# EAGLE board Lilypad_Arduino_USB_Panel-v11 (EAGLE 6.3)
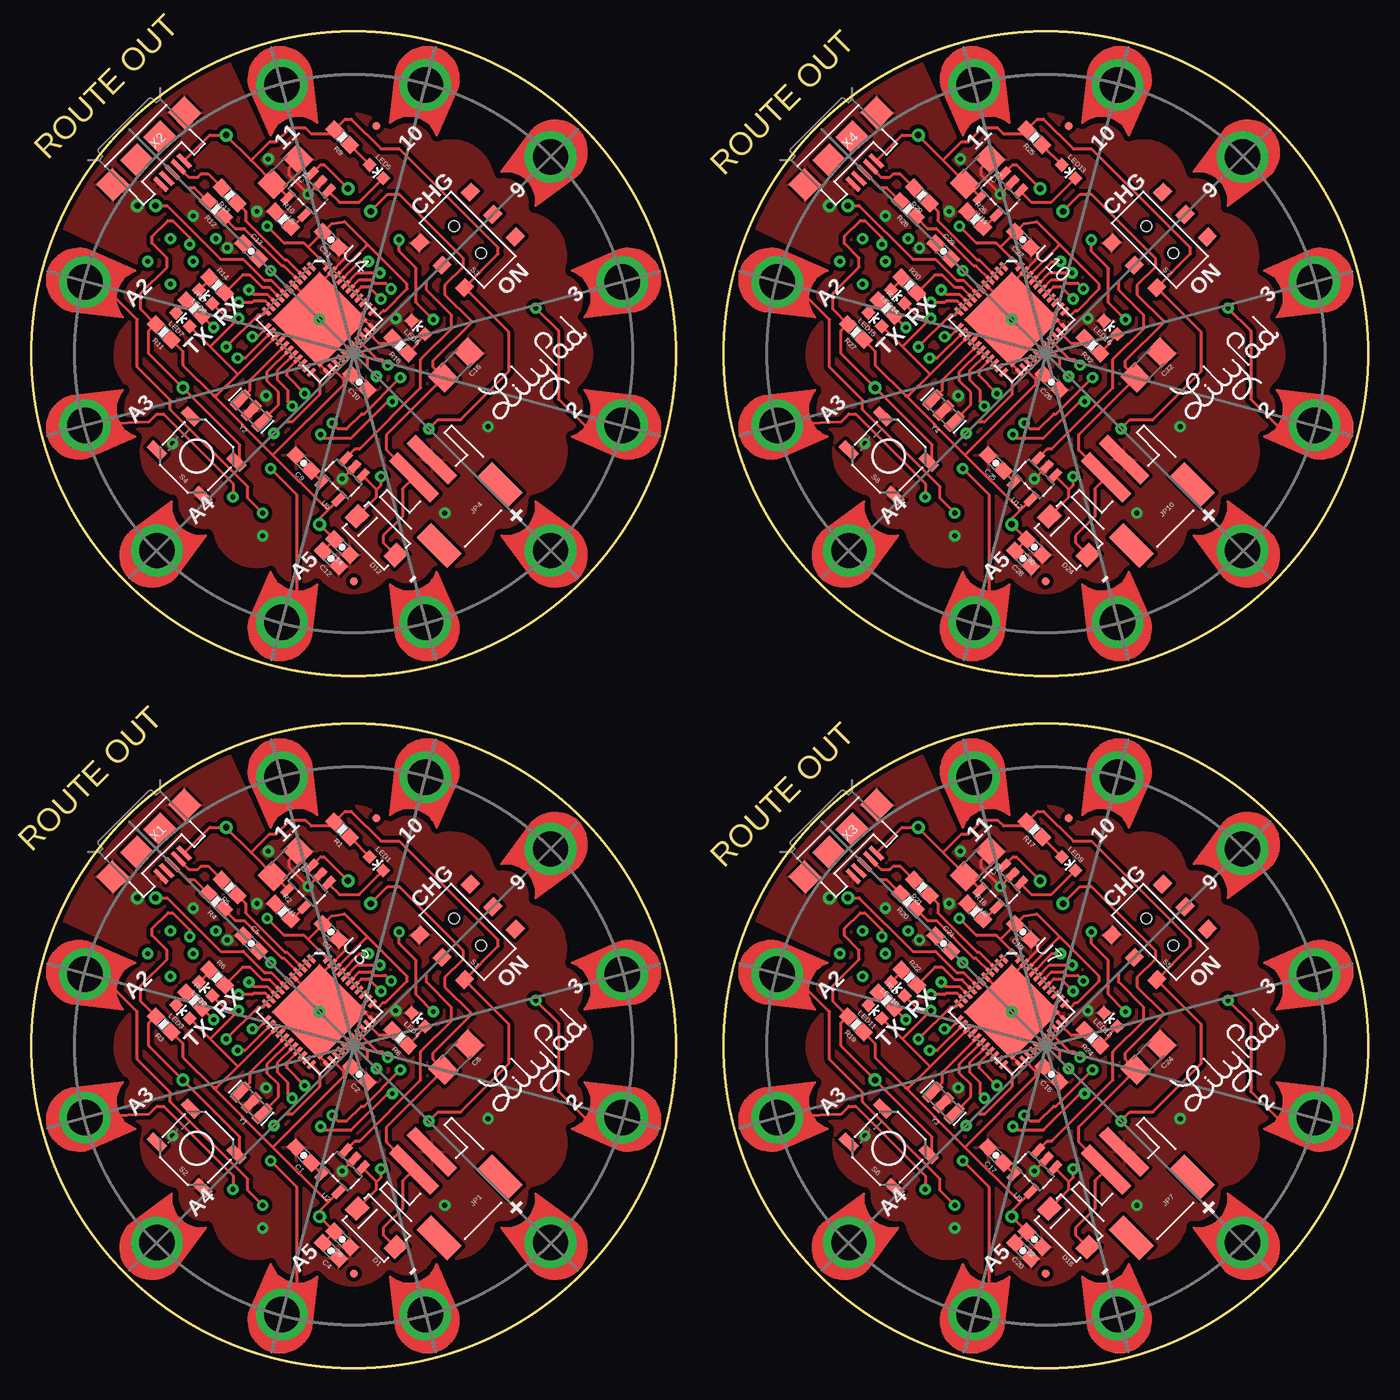
[diagram p0: board, top side]
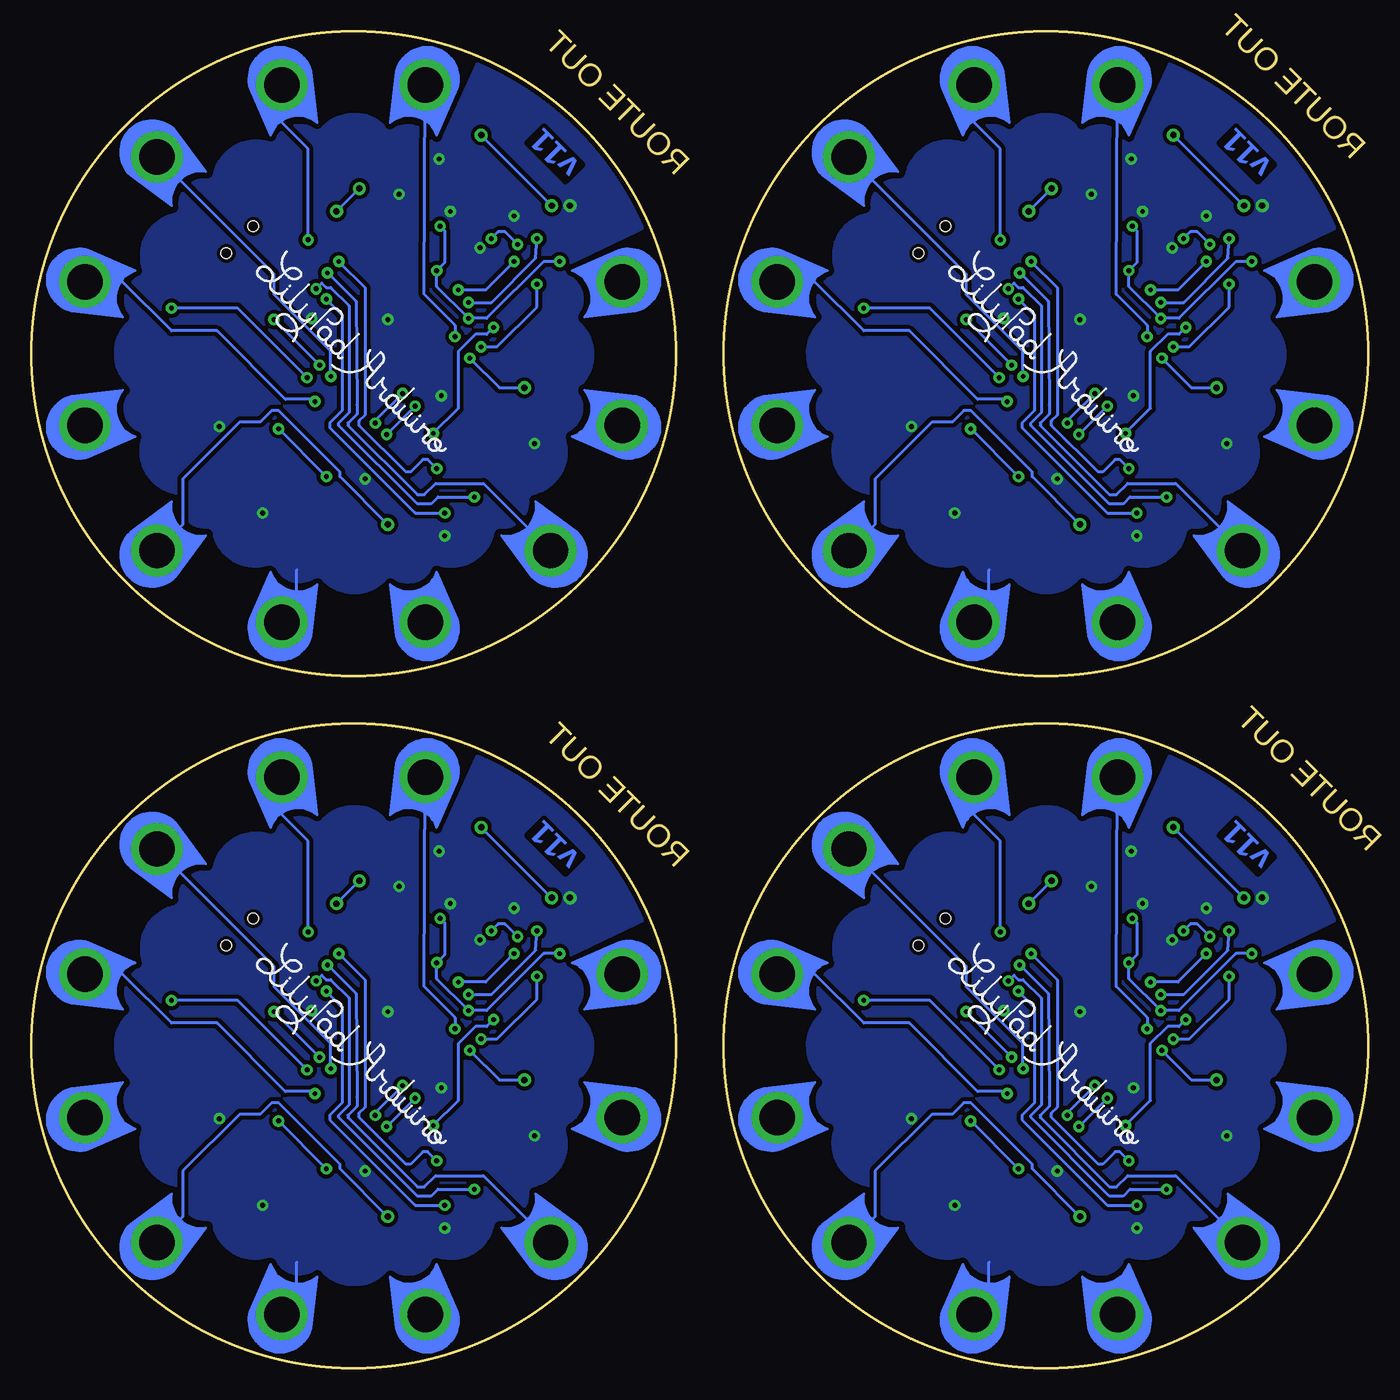
[diagram p1: board, bottom side, seen from below]

Size 105.41 x 105.41 mm. Coordinates in mm from the lower left corner, seen from the top.
Outline: circle at 25.4,25.4 radius 25.4
Outline: circle at 25.4,80.01 radius 25.4
Outline: circle at 80.01,25.4 radius 25.4
Outline: circle at 80.01,80.01 radius 25.4
Copper layers (1*16): Top 0.035mm / dielectric 1.5mm / Bottom 0.035mm
Design rules "default": minimum track width 8mil, minimum drill 20mil, track to track 8mil, track to pad 8mil, pad to pad 8mil, via to via 8mil, smd to smd 8mil, copper to edge 8mil, drill to drill 8mil, minimum pad ring 12mil, minimum via ring 10mil, stop-mask expansion 4mil, vias tented up to drill 20mil, thermal gap 10mil
tRestrict: area 0.3,16 to 8.2,22.5; area 42.6,28.3 to 50.5,34.8; area 5.4,5.5 to 13.8,13.8; area 37,37 to 45.4,45.3; area 42.6,15.8 to 50.5,22.5; area 28.3,42.6 to 35,50.5; area 15.8,0.3 to 22.5,8.2; area 0.3,28.3 to 8.2,35; area 16,42.6 to 22.5,50.5; area 28.3,0.3 to 34.8,8.2; area 2,9.9 to 11.1,18.8; area 0,21.9 to 7.3,28.9; 72 more areas
bRestrict: area 5.4,5.5 to 13.8,13.8; area 37,37 to 45.4,45.3; area 42.6,15.8 to 50.5,22.5; area 28.3,42.6 to 35,50.5; area 15.8,0.3 to 22.5,8.2; area 0.3,28.3 to 8.2,35; area 16,42.6 to 22.5,50.5; area 28.3,0.3 to 34.8,8.2; area 2,9.9 to 11.1,18.8; area 0,21.9 to 7.3,28.9; area 31.9,39.7 to 40.9,48.9; area 21.9,43.6 to 28.9,50.9; 72 more areas

## Footprints (pad centres in the part's own frame; a part is rotated, then mirrored left to right if it is on the bottom)
PETAL-LONG-1-2SIDE = drill 2.794 pad 4.064: 1 0.03,0
0603-CAP = smd 1.1 x 1: 1 -0.85,0; 2 0.85,0
1206 = smd 1.6 x 1.8: 1 -1.4,0; 2 1.4,0
SMA-DIODE = smd 1.27 x 1.47: A -2.15,0; C 2.15,0
JST-2-SMD = smd 1 x 4.6: 1 -1,-3.7; 2 1,-3.7 | smd 1.6 x 3.4: NC1 -3.4,1.5; NC2 3.4,1.5
MICRO-FIDUCIAL = smd 0.635 x 0.635: 1 0,0
LED-0603 = smd 0.8 x 0.8: A 0,-0.75; C 0,0.75
0603-RES = smd 1.1 x 1: 1 -0.85,0; 2 0.85,0
AYZ0202 = smd 1 x 1.15: 1 -2.5,2.825; 2 0,2.825; 3 2.5,2.825; 4 -2.5,-2.825; 5 0,-2.825; 6 2.5,-2.825 | hole 0.85: 1.5,0; -1.5,0
TACTILE_SWITCH_SMD = smd 1.524 x 0.762: 1 -2.54,1.905; 2 2.54,1.905; 3 -2.54,-1.905; 4 2.54,-1.905
SOT23-5 = smd 0.55 x 1.2: 1 -0.95,-1.3; 2 0,-1.3; 3 0.95,-1.3; 4 0.95,1.3; 5 -0.95,1.3
QFN-44 = smd 0.8 x 0.3: 1 -3.4,2.5; 2 -3.4,2; 3 -3.4,1.5; 4 -3.4,1; 5 -3.4,0.5; 6 -3.4,0; 7 -3.4,-0.5; 8 -3.4,-1; 9 -3.4,-1.5; 10 -3.4,-2; 11 -3.4,-2.5; 23 3.4,-2.5; 24 3.4,-2; 25 3.4,-1.5; 26 3.4,-1; 27 3.4,-0.5; 28 3.4,0; 29 3.4,0.5; 30 3.4,1; 31 3.4,1.5; 32 3.4,2; 33 3.4,2.5 | smd 0.3 x 0.8: 12 -2.5,-3.4; 13 -2,-3.4; 14 -1.5,-3.4; 15 -1,-3.4; 16 -0.5,-3.4; 17 0,-3.4; 18 0.5,-3.4; 19 1,-3.4; 20 1.5,-3.4; 21 2,-3.4; 22 2.5,-3.4; 34 2.5,3.4; 35 2,3.4; 36 1.5,3.4; 37 1,3.4; 38 0.5,3.4; 39 0,3.4; 40 -0.5,3.4; 41 -1,3.4; 42 -1.5,3.4; 43 -2,3.4; 44 -2.5,3.4 | smd 5.3 x 5.3: EPAD 0,0
USB-MICROB = smd 0.35 x 1.4: D+ 0,2.65; D- -0.65,2.65; GND 1.3,2.65; ID 0.65,2.65; VBUS -1.3,2.65 | smd 1.8 x 1.9: MT1 -4,0; MT2 4,0 | smd 1.9 x 1.9: P$1 -1.27,0; P$2 1.27,0
RESONATOR-SMD = smd 0.7 x 1.7: 1 -1.2,0; 2 0,0; 3 1.2,0

## Placement (x,y rotation side)
+  SEWTAP9  [PETAL-LONG-1-2SIDE]  40.96,9.84 135 top
+1  SEWTAP9  [PETAL-LONG-1-2SIDE]  40.96,64.45 135 top
+2  SEWTAP9  [PETAL-LONG-1-2SIDE]  95.57,9.84 135 top
+3  SEWTAP9  [PETAL-LONG-1-2SIDE]  95.57,64.45 135 top
-  SEWTAP9  [PETAL-LONG-1-2SIDE]  31.06,4.19 105 top
-1  SEWTAP9  [PETAL-LONG-1-2SIDE]  31.06,58.8 105 top
-2  SEWTAP9  [PETAL-LONG-1-2SIDE]  85.67,4.19 105 top
-3  SEWTAP9  [PETAL-LONG-1-2SIDE]  85.67,58.8 105 top
A1  SEWTAP9  [PETAL-LONG-1-2SIDE]  4.19,85.67 345 top
A2  SEWTAP9  [PETAL-LONG-1-2SIDE]  4.19,31.06 345 top
A3  SEWTAP9  [PETAL-LONG-1-2SIDE]  4.19,19.74 15 top
A4  SEWTAP9  [PETAL-LONG-1-2SIDE]  9.84,9.84 45 top
A5  SEWTAP9  [PETAL-LONG-1-2SIDE]  19.74,4.19 75 top
A6  SEWTAP9  [PETAL-LONG-1-2SIDE]  4.19,74.35 15 top
A7  SEWTAP9  [PETAL-LONG-1-2SIDE]  19.74,58.8 75 top
A8  SEWTAP9  [PETAL-LONG-1-2SIDE]  9.84,64.45 45 top
A9  SEWTAP9  [PETAL-LONG-1-2SIDE]  58.8,31.06 345 top
A10  SEWTAP9  [PETAL-LONG-1-2SIDE]  58.8,19.74 15 top
A11  SEWTAP9  [PETAL-LONG-1-2SIDE]  74.35,4.19 75 top
A12  SEWTAP9  [PETAL-LONG-1-2SIDE]  64.45,9.84 45 top
A13  SEWTAP9  [PETAL-LONG-1-2SIDE]  58.8,85.67 345 top
A14  SEWTAP9  [PETAL-LONG-1-2SIDE]  58.8,74.35 15 top
A15  SEWTAP9  [PETAL-LONG-1-2SIDE]  74.35,58.8 75 top
A16  SEWTAP9  [PETAL-LONG-1-2SIDE]  64.45,64.45 45 top
C1  470pF  [0603-CAP]  21.45,16.78 135 top
C2  .1uF  [0603-CAP]  25.85,23.15 135 top
C3  .1uF  [0603-CAP]  23.6,34.38 135 top
C4  .1uF  [0603-CAP]  23.6,9.24 135 top
C5  1uF  [0603-CAP]  17.32,33.48 315 top
C6  4.7uF  [0603-CAP]  24.5,10.13 135 top
C7  4.7uF  [1206]  20.01,39.77 225 top
C8  4.7uF  [1206]  33.48,24.5 225 top
C9  470pF  [0603-CAP]  21.45,71.39 135 top
C10  .1uF  [0603-CAP]  25.85,77.76 135 top
C11  .1uF  [0603-CAP]  23.6,88.99 135 top
C12  .1uF  [0603-CAP]  23.6,63.85 135 top
C13  1uF  [0603-CAP]  17.32,88.09 315 top
C14  4.7uF  [0603-CAP]  24.5,64.74 135 top
C15  4.7uF  [1206]  20.01,94.38 225 top
C16  4.7uF  [1206]  33.48,79.11 225 top
C17  470pF  [0603-CAP]  76.06,16.78 135 top
C18  .1uF  [0603-CAP]  80.46,23.15 135 top
C19  .1uF  [0603-CAP]  78.21,34.38 135 top
C20  .1uF  [0603-CAP]  78.21,9.24 135 top
C21  1uF  [0603-CAP]  71.93,33.48 315 top
C22  4.7uF  [0603-CAP]  79.11,10.13 135 top
C23  4.7uF  [1206]  74.62,39.77 225 top
C24  4.7uF  [1206]  88.09,24.5 225 top
C25  470pF  [0603-CAP]  76.06,71.39 135 top
C26  .1uF  [0603-CAP]  80.46,77.76 135 top
C27  .1uF  [0603-CAP]  78.21,88.99 135 top
C28  .1uF  [0603-CAP]  78.21,63.85 135 top
C29  1uF  [0603-CAP]  71.93,88.09 315 top
C30  4.7uF  [0603-CAP]  79.11,64.74 135 top
C31  4.7uF  [1206]  74.62,94.38 225 top
C32  4.7uF  [1206]  88.09,79.11 225 top
D1  B340A  [SMA-DIODE]  27.2,11.03 135 top
D2  SEWTAP9  [PETAL-LONG-1-2SIDE]  46.61,74.35 165 top
D3  SEWTAP9  [PETAL-LONG-1-2SIDE]  40.96,95.57 225 top
D4  SEWTAP9  [PETAL-LONG-1-2SIDE]  46.61,85.67 195 top
D5  SEWTAP9  [PETAL-LONG-1-2SIDE]  46.61,19.74 165 top
D6  SEWTAP9  [PETAL-LONG-1-2SIDE]  46.61,31.06 195 top
D7  SEWTAP9  [PETAL-LONG-1-2SIDE]  31.06,101.22 255 top
D8  SEWTAP9  [PETAL-LONG-1-2SIDE]  19.74,101.22 285 top
D9  SEWTAP9  [PETAL-LONG-1-2SIDE]  40.96,40.96 225 top
D10  SEWTAP9  [PETAL-LONG-1-2SIDE]  31.06,46.61 255 top
D11  SEWTAP9  [PETAL-LONG-1-2SIDE]  19.74,46.61 285 top
D12  B340A  [SMA-DIODE]  27.2,65.64 135 top
D13  SEWTAP9  [PETAL-LONG-1-2SIDE]  101.22,19.74 165 top
D14  SEWTAP9  [PETAL-LONG-1-2SIDE]  95.57,40.96 225 top
D15  SEWTAP9  [PETAL-LONG-1-2SIDE]  101.22,31.06 195 top
D16  SEWTAP9  [PETAL-LONG-1-2SIDE]  85.67,46.61 255 top
D17  SEWTAP9  [PETAL-LONG-1-2SIDE]  74.35,46.61 285 top
D18  B340A  [SMA-DIODE]  81.81,11.03 135 top
D19  SEWTAP9  [PETAL-LONG-1-2SIDE]  101.22,74.35 165 top
D20  SEWTAP9  [PETAL-LONG-1-2SIDE]  95.57,95.57 225 top
D21  SEWTAP9  [PETAL-LONG-1-2SIDE]  101.22,85.67 195 top
D22  SEWTAP9  [PETAL-LONG-1-2SIDE]  85.67,101.22 255 top
D23  SEWTAP9  [PETAL-LONG-1-2SIDE]  74.35,101.22 285 top
D24  B340A  [SMA-DIODE]  81.81,65.64 135 top
JP1  JST-2  [JST-2-SMD]  33.48,13.73 225 top
JP2  FIDUCIALUFIDUCIAL  [MICRO-FIDUCIAL]  25.4,7.44 45 top
JP3  FIDUCIALUFIDUCIAL  [MICRO-FIDUCIAL]  27.2,43.36 45 top
JP4  JST-2  [JST-2-SMD]  33.48,68.34 225 top
JP5  FIDUCIALUFIDUCIAL  [MICRO-FIDUCIAL]  25.4,62.05 45 top
JP6  FIDUCIALUFIDUCIAL  [MICRO-FIDUCIAL]  27.2,97.97 45 top
JP7  JST-2  [JST-2-SMD]  88.09,13.73 225 top
JP8  FIDUCIALUFIDUCIAL  [MICRO-FIDUCIAL]  80.01,7.44 45 top
JP9  FIDUCIALUFIDUCIAL  [MICRO-FIDUCIAL]  81.81,43.36 45 top
JP10  JST-2  [JST-2-SMD]  88.09,68.34 225 top
JP11  FIDUCIALUFIDUCIAL  [MICRO-FIDUCIAL]  80.01,62.05 45 top
JP12  FIDUCIALUFIDUCIAL  [MICRO-FIDUCIAL]  81.81,97.97 45 top
LED1  RED  [LED-0603]  27.2,39.77 225 top
LED2  RED  [LED-0603]  13.73,29.89 45 top
LED3  RED  [LED-0603]  11.93,28.09 45 top
LED4  RED  [LED-0603]  30.52,27.47 45 top
LED5  RED  [LED-0603]  27.2,94.38 225 top
LED6  RED  [LED-0603]  13.73,84.5 45 top
LED7  RED  [LED-0603]  11.93,82.7 45 top
LED8  RED  [LED-0603]  30.52,82.08 45 top
LED9  RED  [LED-0603]  81.81,39.77 225 top
LED10  RED  [LED-0603]  68.34,29.89 45 top
LED11  RED  [LED-0603]  66.54,28.09 45 top
LED12  RED  [LED-0603]  85.13,27.47 45 top
LED13  RED  [LED-0603]  81.81,94.38 225 top
LED14  RED  [LED-0603]  68.34,84.5 45 top
LED15  RED  [LED-0603]  66.54,82.7 45 top
LED16  RED  [LED-0603]  85.13,82.08 45 top
R1  330  [0603-RES]  24.5,42.46 135 top
R2  10k  [0603-RES]  19.83,36 315 top
R3  10k  [0603-RES]  10.4,27.11 135 top
R4  22  [0603-RES]  14.53,36.8 135 top
R5  22  [0603-RES]  15.61,37.88 135 top
R6  330  [0603-RES]  14.62,30.79 315 top
R7  330  [0603-RES]  12.83,28.99 315 top
R8  330  [0603-RES]  29.08,26.03 135 top
R9  330  [0603-RES]  24.5,97.07 135 top
R10  10k  [0603-RES]  19.83,90.61 315 top
R11  10k  [0603-RES]  10.4,81.72 135 top
R12  22  [0603-RES]  14.53,91.41 135 top
R13  22  [0603-RES]  15.61,92.49 135 top
R14  330  [0603-RES]  14.62,85.4 315 top
R15  330  [0603-RES]  12.83,83.6 315 top
R16  330  [0603-RES]  29.08,80.64 135 top
R17  330  [0603-RES]  79.11,42.46 135 top
R18  10k  [0603-RES]  74.44,36 315 top
R19  10k  [0603-RES]  65.01,27.11 135 top
R20  22  [0603-RES]  69.14,36.8 135 top
R21  22  [0603-RES]  70.22,37.88 135 top
R22  330  [0603-RES]  69.23,30.79 315 top
R23  330  [0603-RES]  67.44,28.99 315 top
R24  330  [0603-RES]  83.69,26.03 135 top
R25  330  [0603-RES]  79.11,97.07 135 top
R26  10k  [0603-RES]  74.44,90.61 315 top
R27  10k  [0603-RES]  65.01,81.72 135 top
R28  22  [0603-RES]  69.14,91.41 135 top
R29  22  [0603-RES]  70.22,92.49 135 top
R30  330  [0603-RES]  69.23,85.4 315 top
R31  330  [0603-RES]  67.44,83.6 315 top
R32  330  [0603-RES]  83.69,80.64 135 top
S1  SWITCH-DPDTSMD  [AYZ0202]  34.38,34.38 135 top
S2  !RESET  [TACTILE_SWITCH_SMD]  13.01,17.32 135 top
S3  SWITCH-DPDTSMD  [AYZ0202]  34.38,88.99 135 top
S4  !RESET  [TACTILE_SWITCH_SMD]  13.01,71.93 135 top
S5  SWITCH-DPDTSMD  [AYZ0202]  88.99,34.38 135 top
S6  !RESET  [TACTILE_SWITCH_SMD]  67.62,17.32 135 top
S7  SWITCH-DPDTSMD  [AYZ0202]  88.99,88.99 135 top
S8  !RESET  [TACTILE_SWITCH_SMD]  67.62,71.93 135 top
U1  MCP73831  [SOT23-5]  21.81,37.97 135 top
U2  MIC5219  [SOT23-5]  24.5,15.52 135 top
U3  ATMEGA32U4QFN  [QFN-44]  22.71,28.09 315 top
U4  ATMEGA32U4QFN  [QFN-44]  22.71,82.7 315 top
U5  MCP73831  [SOT23-5]  21.81,92.58 135 top
U6  MIC5219  [SOT23-5]  24.5,70.13 135 top
U7  ATMEGA32U4QFN  [QFN-44]  77.32,28.09 315 top
U8  MCP73831  [SOT23-5]  76.42,37.97 135 top
U9  MIC5219  [SOT23-5]  79.11,15.52 135 top
U10  ATMEGA32U4QFN  [QFN-44]  77.32,82.7 315 top
U11  MCP73831  [SOT23-5]  76.42,92.58 135 top
U12  MIC5219  [SOT23-5]  79.11,70.13 135 top
U$1  LOGO-LPLPA  [LOGO-LPA]  25.4,25.4 315 bottom
U$2  LOGO-LPLP  [LOGO-LILYPAD]  39.68,78.84 45 top
U$3  LOGO-LPLPA  [LOGO-LPA]  25.4,80.01 315 bottom
U$4  LOGO-LPLP  [LOGO-LILYPAD]  94.29,24.23 45 top
U$5  LOGO-LPLPA  [LOGO-LPA]  80.01,25.4 315 bottom
U$6  LOGO-LPLP  [LOGO-LILYPAD]  94.29,78.84 45 top
U$7  LOGO-LPLPA  [LOGO-LPA]  80.01,80.01 315 bottom
U$13  LOGO-LPLP  [LOGO-LILYPAD]  39.68,24.23 45 top
X1  USB-MICROB  [USB-MICROB]  9.24,41.56 225 top
X2  USB-MICROB  [USB-MICROB]  9.24,96.17 225 top
X3  USB-MICROB  [USB-MICROB]  63.85,41.56 225 top
X4  USB-MICROB  [USB-MICROB]  63.85,96.17 225 top
Y1  8MHz  [RESONATOR-SMD]  17.32,20.91 135 top
Y2  8MHz  [RESONATOR-SMD]  17.32,75.52 135 top
Y3  8MHz  [RESONATOR-SMD]  71.93,20.91 135 top
Y4  8MHz  [RESONATOR-SMD]  71.93,75.52 135 top

## Library data of the parts
+ +1-+3 - -1--3 A1-A16 D2-D11 D13-D17 D19-D23 U$2 U$4 U$6 U$13 = LilyPad-Wearables; NO_PART: 1
C1 C9 C17 C25 = SparkFun-Passives; PROD_ID: CAP-07884
C2-C4 C10-C12 C18-C20 C26-C28 = SparkFun-Passives; PROD_ID: CAP-00810
C5 C13 C21 C29 = SparkFun-Passives; PROD_ID: CAP-00868
C6 C14 C22 C30 = SparkFun-Passives; PROD_ID: CAP-08280
C7 C8 C15 C16 C23 C24 C31 C32 = SparkFun-Passives; PROD_ID: CAP-10300
D1 D12 D18 D24 = SparkFun-DiscreteSemi; PROD_ID: DIO-09886
JP1 JP4 JP7 JP10 = SparkFun-Connectors; PROD_ID: CONN-08352
JP2 JP3 JP5 JP6 JP8 JP9 JP11 JP12 = SparkFun
LED1-LED16 = SparkFun-LED; PROD_ID: DIO-00819
R1 R6-R9 R14-R17 R22-R25 R30-R32 = SparkFun-Passives; PROD_ID: RES-00818
R2 R3 R10 R11 R18 R19 R26 R27 = SparkFun-Passives; PROD_ID: RES-00824
R4 R5 R12 R13 R20 R21 R28 R29 = SparkFun-Passives; PROD_ID: RES-08698
S1 S3 S5 S7 = SparkFun-Electromechanical; PROD_ID: SWCH-08179
S2 S4 S6 S8 = SparkFun-Electromechanical; PROD_ID: SWCH-08247
U1 U5 U8 U11 = SparkFun-PowerIC; PROD_ID: IC-09995
U2 U6 U9 U12 = SparkFun-PowerIC; PROD_ID: VREG-09872
U3 U4 U7 U10 = SparkFun-DigitalIC; PROD_ID: IC-10828
U$1 U$3 U$5 U$7 = LilyPad-Wearables
X1-X4 = SparkFun-Connectors; PROD_ID: CONN-09505
Y1-Y4 = SparkFun-FreqCtrl; PROD_ID: XTAL-08895

## Nets
3.3V: +.1 C2.2 C3.2 C4.2 C5.2 C6.2 LED2.A LED3.A R3.1 U2.5 U3.6 U3.14 U3.24 U3.34 U3.42 U3.44
3.3V1: +1.1 C10.2 C11.2 C12.2 C13.2 C14.2 LED6.A LED7.A R11.1 U4.6 U4.14 U4.24 U4.34 U4.42 U4.44 U6.5
3.3V2: +2.1 C18.2 C19.2 C20.2 C21.2 C22.2 LED10.A LED11.A R19.1 U7.6 U7.14 U7.24 U7.34 U7.42 U7.44 U9.5
3.3V3: +3.1 C26.2 C27.2 C28.2 C29.2 C30.2 LED14.A LED15.A R27.1 U10.6 U10.14 U10.24 U10.34 U10.42 U10.44 U12.5
5V: C7.2 D1.C R1.2 S1.1 U1.4 U2.1 U3.7 X1.VBUS
5V1: C15.2 D12.C R9.2 S3.1 U4.7 U5.4 U6.1 X2.VBUS
5V2: C23.2 D18.C R17.2 S5.1 U7.7 U8.4 U9.1 X3.VBUS
5V3: C31.2 D24.C R25.2 S7.1 U10.7 U11.4 U12.1 X4.VBUS
D+: R4.1 U3.4
D+1: R12.1 U4.4
D+2: R20.1 U7.4
D+3: R28.1 U10.4
D-: R5.1 U3.3
D-1: R13.1 U4.3
D-2: R21.1 U7.3
D-3: R29.1 U10.3
GND: -.1 C1.2 C2.1 C3.1 C4.1 C5.1 C6.1 C7.1 C8.1 JP1.1 LED4.C R2.1 S1.3 S2.1 U1.2 U2.2 U3.5 U3.15 U3.23 U3.33 U3.35 U3.43 U3.EPAD X1.GND X1.MT1 X1.MT2 Y1.2
GND1: -1.1 C9.2 C10.1 C11.1 C12.1 C13.1 C14.1 C15.1 C16.1 JP4.1 LED8.C R10.1 S3.3 S4.1 U4.5 U4.15 U4.23 U4.33 U4.35 U4.43 U4.EPAD U5.2 U6.2 X2.GND X2.MT1 X2.MT2 Y2.2
GND2: -2.1 C17.2 C18.1 C19.1 C20.1 C21.1 C22.1 C23.1 C24.1 JP7.1 LED12.C R18.1 S5.3 S6.1 U7.5 U7.15 U7.23 U7.33 U7.35 U7.43 U7.EPAD U8.2 U9.2 X3.GND X3.MT1 X3.MT2 Y3.2
GND3: -3.1 C25.2 C26.1 C27.1 C28.1 C29.1 C30.1 C31.1 C32.1 JP10.1 LED16.C R26.1 S7.3 S8.1 U10.5 U10.15 U10.23 U10.33 U10.35 U10.43 U10.EPAD U11.2 U12.2 X4.GND X4.MT1 X4.MT2 Y4.2
MISO: U3.11
MISO1: U4.11
MISO2: U7.11
MISO3: U10.11
MOSI: U3.10
MOSI1: U4.10
MOSI2: U7.10
MOSI3: U10.10
N$1: LED2.C R6.1
N$2: S1.2 U2.3
N$3: LED1.A R1.1
N$4: LED1.C U1.1
N$5: U3.17 Y1.1
N$6: R2.2 U1.5
N$7: U3.16 Y1.3
N$8: C1.1 U2.4
N$9: D11.1 U3.12
N$10: D10.1 U3.30
N$11: D9.1 U3.29
N$12: D5.1 U3.19
N$13: D6.1 U3.18
N$14: A5.1 U3.41
N$15: A4.1 U3.40
N$16: A3.1 U3.39
N$17: A2.1 U3.38
N$18: LED4.A R8.1
N$19: R5.2 X1.D-
N$20: R4.2 X1.D+
N$21: LED3.C R7.1
N$22: S3.2 U6.3
N$23: LED5.A R9.1
N$24: LED5.C U5.1
N$25: R10.2 U5.5
N$26: C9.1 U6.4
N$27: D8.1 U4.12
N$28: D7.1 U4.30
N$29: D3.1 U4.29
N$30: A7.1 U4.41
N$31: A8.1 U4.40
N$32: A6.1 U4.39
N$33: A1.1 U4.38
N$34: R13.2 X2.D-
N$35: R12.2 X2.D+
N$36: LED6.C R14.1
N$37: LED7.C R15.1
N$38: U4.17 Y2.1
N$39: U4.16 Y2.3
N$40: D2.1 U4.19
N$41: D4.1 U4.18
N$42: LED8.A R16.1
N$43: S5.2 U9.3
N$44: LED9.A R17.1
N$45: LED9.C U8.1
N$46: R18.2 U8.5
N$47: C17.1 U9.4
N$48: D17.1 U7.12
N$49: D16.1 U7.30
N$50: D14.1 U7.29
N$51: A11.1 U7.41
N$52: A12.1 U7.40
N$53: A10.1 U7.39
N$54: A9.1 U7.38
N$55: R21.2 X3.D-
N$56: R20.2 X3.D+
N$57: LED10.C R22.1
N$58: LED11.C R23.1
N$59: U7.17 Y3.1
N$60: U7.16 Y3.3
N$61: D13.1 U7.19
N$62: D15.1 U7.18
N$63: LED12.A R24.1
N$64: S7.2 U12.3
N$65: LED13.A R25.1
N$66: LED13.C U11.1
N$67: R26.2 U11.5
N$68: C25.1 U12.4
N$69: D23.1 U10.12
N$70: D22.1 U10.30
N$71: D20.1 U10.29
N$72: A15.1 U10.41
N$73: A16.1 U10.40
N$74: A14.1 U10.39
N$75: A13.1 U10.38
N$76: R29.2 X4.D-
N$77: R28.2 X4.D+
N$78: LED14.C R30.1
N$79: LED15.C R31.1
N$80: U10.17 Y4.1
N$81: U10.16 Y4.3
N$82: D19.1 U10.19
N$83: D21.1 U10.18
N$84: LED16.A R32.1
RESET: R3.2 S2.3 U3.13
RESET1: R11.2 S4.3 U4.13
RESET2: R19.2 S6.3 U7.13
RESET3: R27.2 S8.3 U10.13
RX_LED: R6.2 U3.8
RX_LED1: R14.2 U4.8
RX_LED2: R22.2 U7.8
RX_LED3: R30.2 U10.8
SCK: U3.9
SCK1: U4.9
SCK2: U7.9
SCK3: U10.9
TX_LED: R7.2 U3.22
TX_LED1: R15.2 U4.22
TX_LED2: R23.2 U7.22
TX_LED3: R31.2 U10.22
USER_LED: R8.2 U3.32
USER_LED1: R16.2 U4.32
USER_LED2: R24.2 U7.32
USER_LED3: R32.2 U10.32
V_BATT: C8.2 D1.A JP1.2 U1.3
V_BATT1: C16.2 D12.A JP4.2 U5.3
V_BATT2: C24.2 D18.A JP7.2 U8.3
V_BATT3: C32.2 D24.A JP10.2 U11.3

## Tracks (layer width: path | path; a pad name or v marks a point on that pad's centre or on a via)
3.3V  (via drill 0.38, 0.51)
  Top 0.254: 24.05,13.73 U2.5 23.42,13.1 | 19.02,17.41 23.33,13.1 23.42,13.1 | U3.44 21.79,33.82 | 21.79,33.82 21.5,34.11 19.92,34.11 v18.57,35.46 | 26.48,34.02 29.62,30.88 29.62,30.52 27.91,28.81 27.73,28.81 27.38,28.45 27.15,28.45 U3.34 | 26.48,34.02 24.68,35.82 23.66,35.64 C3.2 21.86,33.84 21.81,33.84 21.79,33.82 | U3.42 26.39,33.9 26.48,34.02 | U3.6 v18.84,31.96 C5.2 | LED3.A 14.08,25.94 | 14.08,25.94 16.24,23.78 16.27,23.78 | U3.14 16.27,23.78 | LED2.A 15.43,28.18 v16.33,28.18 14.08,25.94 | 23.42,13.1 22.71,12.38 v22.71,11.93 C6.2 C4.2 | R3.1 11.93,25.58 11.93,24.5 14.35,22.08 | 14.35,22.08 19.02,17.41 | 16.27,23.78 14.57,22.08 14.35,22.08 | C2.2 25.13,23.87 24.77,23.87 24.68,23.78 24.68,23.47 24.59,23.38 | 19.02,17.41 24.59,22.97 24.59,23.38 | U3.24 24.59,23.38
  Bottom 0.254: v18.57,35.46 18.22,35.1 18.22,32.58 v18.84,31.96 18.84,30.7 v16.33,28.18 14.89,28.18 10.4,32.67 v9.15,32.67 | v22.71,11.93 26.48,15.7 26.48,16.06 31.33,20.91 31.87,20.91 32.76,20.01 34.38,20.01 38.87,15.52 38.87,11.93 +.1
3.3V1  (via drill 0.38, 0.51)
  Top 0.254: 24.05,68.34 U6.5 23.42,67.71 | 19.02,72.02 23.33,67.71 23.42,67.71 | U4.44 21.79,88.43 | 21.79,88.43 21.5,88.72 19.92,88.72 v18.57,90.07 | 26.48,88.63 29.62,85.49 29.62,85.13 27.91,83.42 27.73,83.42 27.38,83.06 27.15,83.06 U4.34 | 26.48,88.63 24.68,90.43 23.66,90.25 C11.2 21.86,88.45 21.81,88.45 21.79,88.43 | U4.42 26.39,88.51 26.48,88.63 | U4.6 v18.84,86.57 C13.2 | LED7.A 14.08,80.55 | 14.08,80.55 16.24,78.39 16.27,78.39 | U4.14 16.27,78.39 | LED6.A 15.43,82.79 v16.33,82.79 14.08,80.55 | 23.42,67.71 22.71,66.99 v22.71,66.54 C14.2 C12.2 | R11.1 11.93,80.19 11.93,79.11 14.35,76.69 | 14.35,76.69 19.02,72.02 | 16.27,78.39 14.57,76.69 14.35,76.69 | C10.2 25.13,78.48 24.77,78.48 24.68,78.39 24.68,78.08 24.59,77.99 | 19.02,72.02 24.59,77.59 24.59,77.99 | U4.24 24.59,77.99
  Bottom 0.254: v18.57,90.07 18.22,89.71 18.22,87.19 v18.84,86.57 18.84,85.31 v16.33,82.79 14.89,82.79 10.4,87.28 v9.15,87.28 | v22.71,66.54 26.48,70.31 26.48,70.67 31.33,75.52 31.87,75.52 32.76,74.62 34.38,74.62 38.87,70.13 38.87,66.54 +1.1
3.3V2  (via drill 0.38, 0.51)
  Top 0.254: 78.66,13.73 U9.5 78.03,13.1 | 73.63,17.41 77.94,13.1 78.03,13.1 | U7.44 76.4,33.82 | 76.4,33.82 76.11,34.11 74.53,34.11 v73.19,35.46 | 81.09,34.02 84.23,30.88 84.23,30.52 82.52,28.81 82.34,28.81 81.99,28.45 81.77,28.45 U7.34 | 81.09,34.02 79.29,35.82 78.27,35.64 C19.2 76.47,33.84 76.42,33.84 76.4,33.82 | U7.42 81,33.9 81.09,34.02 | U7.6 v73.45,31.96 C21.2 | LED11.A 68.69,25.94 | 68.69,25.94 70.85,23.78 70.88,23.78 | U7.14 70.88,23.78 | LED10.A 70.04,28.18 v70.94,28.18 68.69,25.94 | 78.03,13.1 77.32,12.38 v77.32,11.93 C22.2 C20.2 | R19.1 66.54,25.58 66.54,24.5 68.96,22.08 | 68.96,22.08 73.63,17.41 | 70.88,23.78 69.18,22.08 68.96,22.08 | C18.2 79.74,23.87 79.38,23.87 79.29,23.78 79.29,23.47 79.2,23.38 | 73.63,17.41 79.2,22.97 79.2,23.38 | U7.24 79.2,23.38
  Bottom 0.254: v73.19,35.46 72.83,35.1 72.83,32.58 v73.45,31.96 73.45,30.7 v70.94,28.18 69.5,28.18 65.01,32.67 v63.76,32.67 | v77.32,11.93 81.09,15.7 81.09,16.06 85.94,20.91 86.48,20.91 87.37,20.01 88.99,20.01 93.48,15.52 93.48,11.93 +2.1
3.3V3  (via drill 0.38, 0.51)
  Top 0.254: 78.66,68.34 U12.5 78.03,67.71 | 73.63,72.02 77.94,67.71 78.03,67.71 | U10.44 76.4,88.43 | 76.4,88.43 76.11,88.72 74.53,88.72 v73.19,90.07 | 81.09,88.63 84.23,85.49 84.23,85.13 82.52,83.42 82.34,83.42 81.99,83.06 81.77,83.06 U10.34 | 81.09,88.63 79.29,90.43 78.27,90.25 C27.2 76.47,88.45 76.42,88.45 76.4,88.43 | U10.42 81,88.51 81.09,88.63 | U10.6 v73.45,86.57 C29.2 | LED15.A 68.69,80.55 | 68.69,80.55 70.85,78.39 70.88,78.39 | U10.14 70.88,78.39 | LED14.A 70.04,82.79 v70.94,82.79 68.69,80.55 | 78.03,67.71 77.32,66.99 v77.32,66.54 C30.2 C28.2 | R27.1 66.54,80.19 66.54,79.11 68.96,76.69 | 68.96,76.69 73.63,72.02 | 70.88,78.39 69.18,76.69 68.96,76.69 | C26.2 79.74,78.48 79.38,78.48 79.29,78.39 79.29,78.08 79.2,77.99 | 73.63,72.02 79.2,77.59 79.2,77.99 | U10.24 79.2,77.99
  Bottom 0.254: v73.19,90.07 72.83,89.71 72.83,87.19 v73.45,86.57 73.45,85.31 v70.94,82.79 69.5,82.79 65.01,87.28 v63.76,87.28 | v77.32,66.54 81.09,70.31 81.09,70.67 85.94,75.52 86.48,75.52 87.37,74.62 88.99,74.62 93.48,70.13 93.48,66.54 +3.1
5V  (via drill 0.38, 0.51)
  Top 0.254: U1.4 19.16,38.78 | 19.16,38.78 C7.2 | U3.7 18.95,31.15 18.39,31.15 16.69,32.85 14.89,32.85 10.67,37.07 v9.77,37.07 | 17.3,40.64 18.75,42.1 19.29,42.1 20.37,43.18 21.63,43.18 22.08,42.73 23.57,42.73 R1.2 24.74,43.9 25.22,43.9 27.55,41.56 28.99,41.56 36.8,33.75 36.8,33.27 S1.1 37.61,27.15 37.61,23.96 33.84,20.19 32.05,20.19 v31.33,19.47 | D1.C 27.2,14.07 27.2,14.67 | U2.1 27.2,14.67 | 27.2,14.67 27.55,15.02 v27.55,15.7 | X1.VBUS 14.06,42.64 15.3,42.64 | 19.16,38.78 17.3,40.64 | 17.3,40.64 15.3,42.64 | 15.3,42.64 | 15.3,42.64 v15.34,42.64
  Bottom 0.254: v27.55,15.7 v31.33,19.47 | v15.34,42.64 v9.77,37.07
5V1  (via drill 0.38, 0.51)
  Top 0.254: U5.4 19.16,93.39 | 19.16,93.39 C15.2 | U4.7 18.95,85.76 18.39,85.76 16.69,87.46 14.89,87.46 10.67,91.68 v9.77,91.68 | 17.3,95.25 18.75,96.71 19.29,96.71 20.37,97.79 21.63,97.79 22.08,97.34 23.57,97.34 R9.2 24.74,98.51 25.22,98.51 27.55,96.17 28.99,96.17 36.8,88.36 36.8,87.88 S3.1 37.61,81.76 37.61,78.57 33.84,74.8 32.05,74.8 v31.33,74.08 | D12.C 27.2,68.68 27.2,69.28 | U6.1 27.2,69.28 | 27.2,69.28 27.55,69.63 v27.55,70.31 | X2.VBUS 14.06,97.25 15.3,97.25 | 19.16,93.39 17.3,95.25 | 17.3,95.25 15.3,97.25 | 15.3,97.25 | 15.3,97.25 v15.34,97.25
  Bottom 0.254: v27.55,70.31 v31.33,74.08 | v15.34,97.25 v9.77,91.68
5V2  (via drill 0.38, 0.51)
  Top 0.254: U8.4 73.77,38.78 | 73.77,38.78 C23.2 | U7.7 73.56,31.15 73,31.15 71.3,32.85 69.5,32.85 65.28,37.07 v64.38,37.07 | 71.91,40.64 73.37,42.1 73.9,42.1 74.98,43.18 76.24,43.18 76.69,42.73 78.18,42.73 R17.2 79.35,43.9 79.83,43.9 82.16,41.56 83.6,41.56 91.41,33.75 91.41,33.27 S5.1 92.22,27.15 92.22,23.96 88.45,20.19 86.66,20.19 v85.94,19.47 | D18.C 81.81,14.07 81.81,14.67 | U9.1 81.81,14.67 | 81.81,14.67 82.16,15.02 v82.16,15.7 | X3.VBUS 68.67,42.64 69.91,42.64 | 73.77,38.78 71.91,40.64 | 71.91,40.64 69.91,42.64 | 69.91,42.64 | 69.91,42.64 v69.95,42.64
  Bottom 0.254: v82.16,15.7 v85.94,19.47 | v69.95,42.64 v64.38,37.07
5V3  (via drill 0.38, 0.51)
  Top 0.254: U11.4 73.77,93.39 | 73.77,93.39 C31.2 | U10.7 73.56,85.76 73,85.76 71.3,87.46 69.5,87.46 65.28,91.68 v64.38,91.68 | 71.91,95.25 73.37,96.71 73.9,96.71 74.98,97.79 76.24,97.79 76.69,97.34 78.18,97.34 R25.2 79.35,98.51 79.83,98.51 82.16,96.17 83.6,96.17 91.41,88.36 91.41,87.88 S7.1 92.22,81.76 92.22,78.57 88.45,74.8 86.66,74.8 v85.94,74.08 | D24.C 81.81,68.68 81.81,69.28 | U12.1 81.81,69.28 | 81.81,69.28 82.16,69.63 v82.16,70.31 | X4.VBUS 68.67,97.25 69.91,97.25 | 73.77,93.39 71.91,95.25 | 71.91,95.25 69.91,97.25 | 69.91,97.25 | 69.91,97.25 v69.95,97.25
  Bottom 0.254: v82.16,70.31 v85.94,74.08 | v69.95,97.25 v64.38,91.68
D+
  Top 0.254: U3.4 19.9,32.31 19.74,32.31 16.78,35.28 16.06,35.28 R4.1
D+1
  Top 0.254: U4.4 19.9,86.92 19.74,86.92 16.78,89.89 16.06,89.89 R12.1
D+2
  Top 0.254: U7.4 74.51,32.31 74.35,32.31 71.39,35.28 70.67,35.28 R20.1
D+3
  Top 0.254: U10.4 74.51,86.92 74.35,86.92 71.39,89.89 70.67,89.89 R28.1
D-
  Top 0.254: U3.3 20.16,32.76 20.01,32.76 16.87,35.91 16.87,36.62 R5.1
D-1
  Top 0.254: U4.3 20.16,87.37 20.01,87.37 16.87,90.52 16.87,91.23 R13.1
D-2
  Top 0.254: U7.3 74.77,32.76 74.62,32.76 71.48,35.91 71.48,36.62 R21.1
D-3
  Top 0.254: U10.3 74.77,87.37 74.62,87.37 71.48,90.52 71.48,91.23 R29.1
GND  (via drill 0.38, 0.51)
  Top 0.254: U1.2 v21.81,37.97 20.28,39.5 20.28,40.04 C7.1 | U2.2 v24.5,15.52 | U3.23 22.71,24.56 U3.EPAD | U3.5 22.71,28.8 U3.EPAD | U3.EPAD 22.71,30.92 U3.43 24.77,32.99 24.77,33.21 C3.1 | U3.35 25.53,28.09 U3.EPAD | U3.33 26.24,28.09 U3.EPAD | U3.15 21.29,28.09 U3.EPAD
  Bottom 0.254: -.1 29.89,5.38 29.89,8.34
  other vias: 22.71,28.09 12.74,36.27 32.58,12.83 36,19.65 18.22,11.03 17.77,36.63 11.12,18.31 15.43,33.75 18.66,40.76 8.34,37.07 18.49,22.08 28.72,28.18
  pour Top (isolate 0.305): 43.36,43.36 arc90 7.44,43.36 arc90 7.44,7.44 arc90 43.36,7.44 arc90
  pour Bottom (isolate 0.305): 43.36,43.36 arc90 7.44,43.36 arc90 7.44,7.44 arc90 43.36,7.44 arc90
GND1  (via drill 0.38, 0.51)
  Top 0.254: U5.2 v21.81,92.58 20.28,94.11 20.28,94.65 C15.1 | U6.2 v24.5,70.13 | U4.23 22.71,79.17 U4.EPAD | U4.5 22.71,83.41 U4.EPAD | U4.EPAD 22.71,85.53 U4.43 24.77,87.6 24.77,87.82 C11.1 | U4.35 25.53,82.7 U4.EPAD | U4.33 26.24,82.7 U4.EPAD | U4.15 21.29,82.7 U4.EPAD
  Bottom 0.254: -1.1 29.89,59.98 29.89,62.95
  other vias: 22.71,82.7 12.74,90.88 32.58,67.44 36,74.26 18.22,65.64 17.77,91.24 11.12,72.92 15.43,88.36 18.66,95.37 8.34,91.68 18.49,76.69 28.72,82.79
  pour Top (isolate 0.305): 43.36,97.97 arc90 7.44,97.97 arc90 7.44,62.05 arc90 43.36,62.05 arc90
  pour Bottom (isolate 0.305): 43.36,97.97 arc90 7.44,97.97 arc90 7.44,62.05 arc90 43.36,62.05 arc90
GND2  (via drill 0.38, 0.51)
  Top 0.254: U8.2 v76.42,37.97 74.89,39.5 74.89,40.04 C23.1 | U9.2 v79.11,15.52 | U7.23 77.32,24.56 U7.EPAD | U7.5 77.32,28.8 U7.EPAD | U7.EPAD 77.32,30.92 U7.43 79.38,32.99 79.38,33.21 C19.1 | U7.35 80.14,28.09 U7.EPAD | U7.33 80.85,28.09 U7.EPAD | U7.15 75.9,28.09 U7.EPAD
  Bottom 0.254: -2.1 84.5,5.38 84.5,8.34
  other vias: 77.32,28.09 67.35,36.27 87.19,12.83 90.61,19.65 72.83,11.03 72.38,36.63 65.73,18.31 70.04,33.75 73.27,40.76 62.95,37.07 73.1,22.08 83.33,28.18
  pour Top (isolate 0.305): 97.97,43.36 arc90 62.05,43.36 arc90 62.05,7.44 arc90 97.97,7.44 arc90
  pour Bottom (isolate 0.305): 97.97,43.36 arc90 62.05,43.36 arc90 62.05,7.44 arc90 97.97,7.44 arc90
GND3  (via drill 0.38, 0.51)
  Top 0.254: U11.2 v76.42,92.58 74.89,94.11 74.89,94.65 C31.1 | U12.2 v79.11,70.13 | U10.23 77.32,79.17 U10.EPAD | U10.5 77.32,83.41 U10.EPAD | U10.EPAD 77.32,85.53 U10.43 79.38,87.6 79.38,87.82 C27.1 | U10.35 80.14,82.7 U10.EPAD | U10.33 80.85,82.7 U10.EPAD | U10.15 75.9,82.7 U10.EPAD
  Bottom 0.254: -3.1 84.5,59.98 84.5,62.95
  other vias: 77.32,82.7 67.35,90.88 87.19,67.44 90.61,74.26 72.83,65.64 72.38,91.24 65.73,72.92 70.04,88.36 73.27,95.37 62.95,91.68 73.1,76.69 83.33,82.79
  pour Top (isolate 0.305): 97.97,97.97 arc90 62.05,97.97 arc90 62.05,62.05 arc90 97.97,62.05 arc90
  pour Bottom (isolate 0.305): 97.97,97.97 arc90 62.05,97.97 arc90 62.05,62.05 arc90 97.97,62.05 arc90
MISO  (via drill 0.38)
  Top 0.254: v15.34,25.94 17.86,28.45 18.26,28.45 U3.11
  Bottom 0.254: v15.34,25.94 14.08,25.94 10.94,29.08 v10.94,30.88
MISO1  (via drill 0.38)
  Top 0.254: v15.34,80.55 17.86,83.06 18.26,83.06 U4.11
  Bottom 0.254: v15.34,80.55 14.08,80.55 10.94,83.69 v10.94,85.49
MISO2  (via drill 0.38)
  Top 0.254: v69.95,25.94 72.47,28.45 72.87,28.45 U7.11
  Bottom 0.254: v69.95,25.94 68.69,25.94 65.55,29.08 v65.55,30.88
MISO3  (via drill 0.38)
  Top 0.254: v69.95,80.55 72.47,83.06 72.87,83.06 U10.11
  Bottom 0.254: v69.95,80.55 68.69,80.55 65.55,83.69 v65.55,85.49
MOSI  (via drill 0.38)
  Top 0.254: U3.10 18.44,29.53 17.5,29.53 17.41,29.44 v16.33,29.44
  Bottom 0.254: v16.33,29.44 14.53,29.44 11.03,32.94 v10.94,34.47
MOSI1  (via drill 0.38)
  Top 0.254: U4.10 18.44,84.14 17.5,84.14 17.41,84.05 v16.33,84.05
  Bottom 0.254: v16.33,84.05 14.53,84.05 11.03,87.55 v10.94,89.08
MOSI2  (via drill 0.38)
  Top 0.254: U7.10 73.05,29.53 72.11,29.53 72.02,29.44 v70.94,29.44
  Bottom 0.254: v70.94,29.44 69.14,29.44 65.64,32.94 v65.55,34.47
MOSI3  (via drill 0.38)
  Top 0.254: U10.10 73.05,84.14 72.11,84.14 72.02,84.05 v70.94,84.05
  Bottom 0.254: v70.94,84.05 69.14,84.05 65.64,87.55 v65.55,89.08
N$1
  Top 0.254: LED2.C 14.02,31.25 R6.1
N$2
  Top 0.254: S1.2 31.15,31.15 31.15,30.43 33.12,28.45 33.12,27.38 30.7,24.95 30.7,22.7 25.85,17.86 25.49,17.86 U2.3
N$3
  Top 0.254: R1.1 LED1.A
N$4
  Top 0.254: U1.1 24.27,37.34 25.83,37.34 LED1.C
N$5
  Top 0.254: Y1.1 19.47,21.37 19.47,22.35 18.57,23.24 18.57,23.96 U3.17
N$6
  Top 0.254: U1.5 20.75,35.58 R2.2
N$7
  Top 0.254: Y1.3 17.23,22.52 17.23,23.32 U3.16
N$8
  Top 0.254: U2.4 21.51,16.67 C1.1
N$9  (via drill 0.38)
  Top 0.254: U3.12 17.82,26.75 v17.41,26.75
  Bottom 0.254: D11.1 19.84,30.08 17.41,27.64 v17.41,26.75
N$10  (via drill 0.38)
  Top 0.254: U3.30 27.26,24.95 27.64,24.95 v28.09,24.5 | v31.69,28.09 30.34,29.44 30.34,32.13 28.99,33.48 v28.99,34.38
  Bottom 0.254: v28.09,24.5 v31.69,28.09 | v28.99,34.38 28.99,41.56 31.05,43.62 D10.1
N$11  (via drill 0.38)
  Top 0.254: U3.29 26.47,25.04 26.48,24.32 v27.2,23.6
  Bottom 0.254: v27.2,23.6 27.2,25.58 31.69,30.07 31.69,31.69 D9.1
N$12  (via drill 0.38)
  Top 0.254: U3.19 20.1,24.08 20.1,23.69 v21.54,22.26 | v23.69,19.92 24.14,19.47 24.86,19.47 26.03,20.64 26.21,20.64 v29.08,23.51 | v39.77,28.99 41.56,27.2 41.56,21.81 43.62,19.75 D5.1
  Bottom 0.254: v21.54,22.26 23.69,20.1 v23.69,19.92 | v29.08,23.51 34.56,28.99 v39.77,28.99
N$13  (via drill 0.38)
  Top 0.254: U3.18 19.38,24.06 19.38,23.33 20.19,22.53 20.19,21.63 v20.55,21.27 | v22.8,19.02 23.06,18.75 25.22,18.75 28.09,21.63 v28.45,21.63
  Bottom 0.254: v20.55,21.27 v22.8,19.02 | v28.45,21.63 28.63,21.81 30.79,21.81 36.18,27.2 39.77,27.2 43.62,31.05 D6.1
N$14  (via drill 0.38)
  Top 0.254: U3.41 25.87,32.67 v26.57,32.67 | v18.84,16.33 20.91,14.26 20.91,4.74 20.38,4.22 A5.1
  Bottom 0.254: v26.57,32.67 24.5,30.61 24.5,20.55 24.95,20.1 24.95,19.74 21.27,16.06 20.91,16.06 19.92,17.05 19.56,17.05 v18.84,16.33
N$15  (via drill 0.38)
  Top 0.254: U3.40 25.68,31.78 v27.46,31.78
  Bottom 0.254: v27.46,31.78 25.22,29.53 25.13,21.36 25.13,20.64 25.85,19.92 25.85,19.74 20.37,14.26 19.83,14.26 18.93,15.16 15.16,15.16 A4.1
N$16  (via drill 0.38)
  Top 0.254: U3.39 25.85,31.24 26.75,31.24 27.02,30.97 27.91,30.97 v28.36,30.52 | A3.1 9.24,20.01 9.86,20.64 10.4,20.64 15.88,15.16 v15.88,14.08
  Bottom 0.254: v28.36,30.52 27.91,30.97 27.55,30.61 27.2,30.61 25.76,29.17 25.76,20.73 26.57,19.92 26.57,19.74 20.37,13.55 19.29,13.55 18.75,14.08 v15.88,14.08
N$17  (via drill 0.38)
  Top 0.254: U3.38 26.02,30.7 26.57,30.7 v27.55,29.71 | v18.22,12.83 17.05,13.99 17.05,14.89 10.94,21 10.94,21.72 8.34,24.32 8.34,28.09 5.38,31.05 A2.1 4.22,30.96
  Bottom 0.254: v27.55,29.71 26.3,28.45 26.3,20.91 27.29,19.92 27.29,19.56 20.55,12.83 v18.22,12.83
N$18
  Top 0.254: R8.1 30.43,26.17 30.43,26.31 LED4.A
N$19
  Top 0.254: X1.D- 12.4,39.32 13.1,39.32 13.37,39.59 13.9,39.59 R5.2
N$20
  Top 0.254: X1.D+ 12.29,38.51 12.83,38.51 R4.2
N$21
  Top 0.254: LED3.C 12.23,29.45 R7.1
N$22
  Top 0.254: S3.2 31.15,85.76 31.15,85.04 33.12,83.06 33.12,81.99 30.7,79.56 30.7,77.31 25.85,72.47 25.49,72.47 U6.3
N$23
  Top 0.254: R9.1 LED5.A
N$24
  Top 0.254: U5.1 24.27,91.95 25.83,91.95 LED5.C
N$25
  Top 0.254: U5.5 20.75,90.19 R10.2
N$26
  Top 0.254: U6.4 21.51,71.28 C9.1
N$27  (via drill 0.38)
  Top 0.254: U4.12 17.82,81.36 v17.41,81.36
  Bottom 0.254: D8.1 19.84,84.69 17.41,82.25 v17.41,81.36
N$28  (via drill 0.38)
  Top 0.254: U4.30 27.26,79.56 27.64,79.56 v28.09,79.11 | v31.69,82.7 30.34,84.05 30.34,86.75 28.99,88.09 v28.99,88.99
  Bottom 0.254: v28.09,79.11 v31.69,82.7 | v28.99,88.99 28.99,96.17 31.05,98.23 D7.1
N$29  (via drill 0.38)
  Top 0.254: U4.29 26.47,79.65 26.48,78.93 v27.2,78.21
  Bottom 0.254: v27.2,78.21 27.2,80.19 31.69,84.68 31.69,86.3 D3.1
N$30  (via drill 0.38)
  Top 0.254: U4.41 25.87,87.28 v26.57,87.28 | v18.84,70.94 20.91,68.87 20.91,59.35 20.38,58.83 A7.1
  Bottom 0.254: v26.57,87.28 24.5,85.22 24.5,75.16 24.95,74.71 24.95,74.35 21.27,70.67 20.91,70.67 19.92,71.66 19.56,71.66 v18.84,70.94
N$31  (via drill 0.38)
  Top 0.254: U4.40 25.68,86.39 v27.46,86.39
  Bottom 0.254: v27.46,86.39 25.22,84.14 25.13,75.97 25.13,75.25 25.85,74.53 25.85,74.35 20.37,68.87 19.83,68.87 18.93,69.77 15.16,69.77 A8.1
N$32  (via drill 0.38)
  Top 0.254: U4.39 25.85,85.85 26.75,85.85 27.02,85.58 27.91,85.58 v28.36,85.13 | A6.1 9.24,74.62 9.86,75.25 10.4,75.25 15.88,69.77 v15.88,68.69
  Bottom 0.254: v28.36,85.13 27.91,85.58 27.55,85.22 27.2,85.22 25.76,83.78 25.76,75.34 26.57,74.53 26.57,74.35 20.37,68.16 19.29,68.16 18.75,68.69 v15.88,68.69
N$33  (via drill 0.38)
  Top 0.254: U4.38 26.02,85.31 26.57,85.31 v27.55,84.32 | v18.22,67.44 17.05,68.6 17.05,69.5 10.94,75.61 10.94,76.33 8.34,78.93 8.34,82.7 5.38,85.66 A1.1 4.22,85.57
  Bottom 0.254: v27.55,84.32 26.3,83.06 26.3,75.52 27.29,74.53 27.29,74.17 20.55,67.44 v18.22,67.44
N$34
  Top 0.254: X2.D- 12.4,93.93 13.1,93.93 13.37,94.2 13.9,94.2 R13.2
N$35
  Top 0.254: X2.D+ 12.29,93.12 12.83,93.12 R12.2
N$36
  Top 0.254: LED6.C 14.02,85.86 R14.1
N$37
  Top 0.254: LED7.C 12.23,84.06 R15.1
N$38
  Top 0.254: Y2.1 19.47,75.98 19.47,76.96 18.57,77.85 18.57,78.57 U4.17
N$39
  Top 0.254: Y2.3 17.23,77.13 17.23,77.93 U4.16
N$40  (via drill 0.38)
  Top 0.254: U4.19 20.1,78.69 20.1,78.3 v21.54,76.87 | v23.69,74.53 24.14,74.08 24.86,74.08 26.03,75.25 26.21,75.25 v29.08,78.12 | v39.77,83.6 41.56,81.81 41.56,76.42 43.62,74.36 D2.1
  Bottom 0.254: v21.54,76.87 23.69,74.71 v23.69,74.53 | v29.08,78.12 34.56,83.6 v39.77,83.6
N$41  (via drill 0.38)
  Top 0.254: U4.18 19.38,78.67 19.38,77.94 20.19,77.14 20.19,76.24 v20.55,75.88 | v22.8,73.63 23.06,73.37 25.22,73.37 28.09,76.24 v28.45,76.24
  Bottom 0.254: v20.55,75.88 v22.8,73.63 | v28.45,76.24 28.63,76.42 30.79,76.42 36.18,81.81 39.77,81.81 43.62,85.66 D4.1
N$42
  Top 0.254: R16.1 30.43,80.78 30.43,80.92 LED8.A
N$43
  Top 0.254: S5.2 85.76,31.15 85.76,30.43 87.73,28.45 87.73,27.38 85.31,24.95 85.31,22.7 80.46,17.86 80.1,17.86 U9.3
N$44
  Top 0.254: R17.1 LED9.A
N$45
  Top 0.254: U8.1 78.88,37.34 80.44,37.34 LED9.C
N$46
  Top 0.254: U8.5 75.36,35.58 R18.2
N$47
  Top 0.254: U9.4 76.12,16.67 C17.1
N$48  (via drill 0.38)
  Top 0.254: U7.12 72.43,26.75 v72.02,26.75
  Bottom 0.254: D17.1 74.45,30.08 72.02,27.64 v72.02,26.75
N$49  (via drill 0.38)
  Top 0.254: U7.30 81.87,24.95 82.25,24.95 v82.7,24.5 | v86.3,28.09 84.95,29.44 84.95,32.13 83.6,33.48 v83.6,34.38
  Bottom 0.254: v82.7,24.5 v86.3,28.09 | v83.6,34.38 83.6,41.56 85.66,43.62 D16.1
N$50  (via drill 0.38)
  Top 0.254: U7.29 81.08,25.04 81.09,24.32 v81.81,23.6
  Bottom 0.254: v81.81,23.6 81.81,25.58 86.3,30.07 86.3,31.69 D14.1
N$51  (via drill 0.38)
  Top 0.254: U7.41 80.48,32.67 v81.18,32.67 | v73.45,16.33 75.52,14.26 75.52,4.74 74.99,4.22 A11.1
  Bottom 0.254: v81.18,32.67 79.11,30.61 79.11,20.55 79.56,20.1 79.56,19.74 75.88,16.06 75.52,16.06 74.53,17.05 74.17,17.05 v73.45,16.33
N$52  (via drill 0.38)
  Top 0.254: U7.40 80.29,31.78 v82.07,31.78
  Bottom 0.254: v82.07,31.78 79.83,29.53 79.74,21.36 79.74,20.64 80.46,19.92 80.46,19.74 74.98,14.26 74.44,14.26 73.54,15.16 69.77,15.16 A12.1
N$53  (via drill 0.38)
  Top 0.254: U7.39 80.46,31.24 81.36,31.24 81.63,30.97 82.52,30.97 v82.97,30.52 | A10.1 63.85,20.01 64.47,20.64 65.01,20.64 70.49,15.16 v70.49,14.08
  Bottom 0.254: v82.97,30.52 82.52,30.97 82.16,30.61 81.81,30.61 80.37,29.17 80.37,20.73 81.18,19.92 81.18,19.74 74.98,13.55 73.9,13.55 73.37,14.08 v70.49,14.08
N$54  (via drill 0.38)
  Top 0.254: U7.38 80.63,30.7 81.18,30.7 v82.16,29.71 | v72.83,12.83 71.66,13.99 71.66,14.89 65.55,21 65.55,21.72 62.95,24.32 62.95,28.09 59.99,31.05 A9.1 58.83,30.96
  Bottom 0.254: v82.16,29.71 80.91,28.45 80.91,20.91 81.9,19.92 81.9,19.56 75.16,12.83 v72.83,12.83
N$55
  Top 0.254: X3.D- 67.01,39.32 67.71,39.32 67.98,39.59 68.52,39.59 R21.2
N$56
  Top 0.254: X3.D+ 66.9,38.51 67.44,38.51 R20.2
N$57
  Top 0.254: LED10.C 68.63,31.25 R22.1
N$58
  Top 0.254: LED11.C 66.84,29.45 R23.1
N$59
  Top 0.254: Y3.1 74.08,21.37 74.08,22.35 73.19,23.24 73.19,23.96 U7.17
N$60
  Top 0.254: Y3.3 71.84,22.52 71.84,23.32 U7.16
N$61  (via drill 0.38)
  Top 0.254: U7.19 74.71,24.08 74.71,23.69 v76.15,22.26 | v78.3,19.92 78.75,19.47 79.47,19.47 80.64,20.64 80.82,20.64 v83.69,23.51 | v94.38,28.99 96.17,27.2 96.17,21.81 98.23,19.75 D13.1
  Bottom 0.254: v76.15,22.26 78.3,20.1 v78.3,19.92 | v83.69,23.51 89.17,28.99 v94.38,28.99
N$62  (via drill 0.38)
  Top 0.254: U7.18 73.99,24.06 73.99,23.33 74.8,22.53 74.8,21.63 v75.16,21.27 | v77.41,19.02 77.67,18.75 79.83,18.75 82.7,21.63 v83.06,21.63
  Bottom 0.254: v75.16,21.27 v77.41,19.02 | v83.06,21.63 83.24,21.81 85.4,21.81 90.79,27.2 94.38,27.2 98.23,31.05 D15.1
N$63
  Top 0.254: R24.1 85.04,26.17 85.04,26.31 LED12.A
N$64
  Top 0.254: S7.2 85.76,85.76 85.76,85.04 87.73,83.06 87.73,81.99 85.31,79.56 85.31,77.31 80.46,72.47 80.1,72.47 U12.3
N$65
  Top 0.254: R25.1 LED13.A
N$66
  Top 0.254: U11.1 78.88,91.95 80.44,91.95 LED13.C
N$67
  Top 0.254: U11.5 75.36,90.19 R26.2
N$68
  Top 0.254: U12.4 76.12,71.28 C25.1
N$69  (via drill 0.38)
  Top 0.254: U10.12 72.43,81.36 v72.02,81.36
  Bottom 0.254: D23.1 74.45,84.69 72.02,82.25 v72.02,81.36
N$70  (via drill 0.38)
  Top 0.254: U10.30 81.87,79.56 82.25,79.56 v82.7,79.11 | v86.3,82.7 84.95,84.05 84.95,86.75 83.6,88.09 v83.6,88.99
  Bottom 0.254: v82.7,79.11 v86.3,82.7 | v83.6,88.99 83.6,96.17 85.66,98.23 D22.1
N$71  (via drill 0.38)
  Top 0.254: U10.29 81.08,79.65 81.09,78.93 v81.81,78.21
  Bottom 0.254: v81.81,78.21 81.81,80.19 86.3,84.68 86.3,86.3 D20.1
N$72  (via drill 0.38)
  Top 0.254: U10.41 80.48,87.28 v81.18,87.28 | v73.45,70.94 75.52,68.87 75.52,59.35 74.99,58.83 A15.1
  Bottom 0.254: v81.18,87.28 79.11,85.22 79.11,75.16 79.56,74.71 79.56,74.35 75.88,70.67 75.52,70.67 74.53,71.66 74.17,71.66 v73.45,70.94
N$73  (via drill 0.38)
  Top 0.254: U10.40 80.29,86.39 v82.07,86.39
  Bottom 0.254: v82.07,86.39 79.83,84.14 79.74,75.97 79.74,75.25 80.46,74.53 80.46,74.35 74.98,68.87 74.44,68.87 73.54,69.77 69.77,69.77 A16.1
N$74  (via drill 0.38)
  Top 0.254: U10.39 80.46,85.85 81.36,85.85 81.63,85.58 82.52,85.58 v82.97,85.13 | A14.1 63.85,74.62 64.47,75.25 65.01,75.25 70.49,69.77 v70.49,68.69
  Bottom 0.254: v82.97,85.13 82.52,85.58 82.16,85.22 81.81,85.22 80.37,83.78 80.37,75.34 81.18,74.53 81.18,74.35 74.98,68.16 73.9,68.16 73.37,68.69 v70.49,68.69
N$75  (via drill 0.38)
  Top 0.254: U10.38 80.63,85.31 81.18,85.31 v82.16,84.32 | v72.83,67.44 71.66,68.6 71.66,69.5 65.55,75.61 65.55,76.33 62.95,78.93 62.95,82.7 59.99,85.66 A13.1 58.83,85.57
  Bottom 0.254: v82.16,84.32 80.91,83.06 80.91,75.52 81.9,74.53 81.9,74.17 75.16,67.44 v72.83,67.44
N$76
  Top 0.254: X4.D- 67.01,93.93 67.71,93.93 67.98,94.2 68.52,94.2 R29.2
N$77
  Top 0.254: X4.D+ 66.9,93.12 67.44,93.12 R28.2
N$78
  Top 0.254: LED14.C 68.63,85.86 R30.1
N$79
  Top 0.254: LED15.C 66.84,84.06 R31.1
N$80
  Top 0.254: Y4.1 74.08,75.98 74.08,76.96 73.19,77.85 73.19,78.57 U10.17
N$81
  Top 0.254: Y4.3 71.84,77.13 71.84,77.93 U10.16
N$82  (via drill 0.38)
  Top 0.254: U10.19 74.71,78.69 74.71,78.3 v76.15,76.87 | v78.3,74.53 78.75,74.08 79.47,74.08 80.64,75.25 80.82,75.25 v83.69,78.12 | v94.38,83.6 96.17,81.81 96.17,76.42 98.23,74.36 D19.1
  Bottom 0.254: v76.15,76.87 78.3,74.71 v78.3,74.53 | v83.69,78.12 89.17,83.6 v94.38,83.6
N$83  (via drill 0.38)
  Top 0.254: U10.18 73.99,78.67 73.99,77.94 74.8,77.14 74.8,76.24 v75.16,75.88 | v77.41,73.63 77.67,73.37 79.83,73.37 82.7,76.24 v83.06,76.24
  Bottom 0.254: v75.16,75.88 v77.41,73.63 | v83.06,76.24 83.24,76.42 85.4,76.42 90.79,81.81 94.38,81.81 98.23,85.66 D21.1
N$84
  Top 0.254: R32.1 85.04,80.78 85.04,80.92 LED16.A
RESET  (via drill 0.38, 0.51)
  Top 0.254: U3.13 16.82,25.04 v16.24,25.04 | v12.47,34.02 12.47,34.56 11.12,35.91 10.76,35.91 9.5,34.65 9.5,34.11 10.67,32.94 10.67,32.23 8.61,30.16 8.61,28.9 R3.2 9.75,27.71 9.24,27.2 9.24,25.4 v11.93,22.71 16.42,18.22 16.42,17.14 S2.3
  Bottom 0.254: v12.47,34.02 13.46,35.01 13.99,35.01 v14.53,34.47 | v16.24,25.04 13.9,22.71 v11.93,22.71
RESET1  (via drill 0.38, 0.51)
  Top 0.254: U4.13 16.82,79.65 v16.24,79.65 | v12.47,88.63 12.47,89.17 11.12,90.52 10.76,90.52 9.5,89.26 9.5,88.72 10.67,87.55 10.67,86.84 8.61,84.77 8.61,83.51 R11.2 9.75,82.32 9.24,81.81 9.24,80.01 v11.93,77.32 16.42,72.83 16.42,71.75 S4.3
  Bottom 0.254: v12.47,88.63 13.46,89.62 13.99,89.62 v14.53,89.08 | v16.24,79.65 13.9,77.32 v11.93,77.32
RESET2  (via drill 0.38, 0.51)
  Top 0.254: U7.13 71.43,25.04 v70.85,25.04 | v67.08,34.02 67.08,34.56 65.73,35.91 65.37,35.91 64.12,34.65 64.12,34.11 65.28,32.94 65.28,32.23 63.22,30.16 63.22,28.9 R19.2 64.36,27.71 63.85,27.2 63.85,25.4 v66.54,22.71 71.03,18.22 71.03,17.14 S6.3
  Bottom 0.254: v67.08,34.02 68.07,35.01 68.6,35.01 v69.14,34.47 | v70.85,25.04 68.52,22.71 v66.54,22.71
RESET3  (via drill 0.38, 0.51)
  Top 0.254: U10.13 71.43,79.65 v70.85,79.65 | v67.08,88.63 67.08,89.17 65.73,90.52 65.37,90.52 64.12,89.26 64.12,88.72 65.28,87.55 65.28,86.84 63.22,84.77 63.22,83.51 R27.2 64.36,82.32 63.85,81.81 63.85,80.01 v66.54,77.32 71.03,72.83 71.03,71.75 S8.3
  Bottom 0.254: v67.08,88.63 68.07,89.62 68.6,89.62 v69.14,89.08 | v70.85,79.65 68.52,77.32 v66.54,77.32
RX_LED
  Top 0.254: U3.8 18.78,30.61 18.22,30.61 17.23,31.6 16.63,31.6 R6.2
RX_LED1
  Top 0.254: U4.8 18.78,85.22 18.22,85.22 17.23,86.21 16.63,86.21 R14.2
RX_LED2
  Top 0.254: U7.8 73.39,30.61 72.83,30.61 71.84,31.6 71.24,31.6 R22.2
RX_LED3
  Top 0.254: U10.8 73.39,85.22 72.83,85.22 71.84,86.21 71.24,86.21 R30.2
SCK  (via drill 0.38)
  Top 0.254: U3.9 18.61,30.07 17.5,30.07 v17.14,30.43
  Bottom 0.254: v12.74,32.67 14.98,30.43 v17.14,30.43
SCK1  (via drill 0.38)
  Top 0.254: U4.9 18.61,84.68 17.5,84.68 v17.14,85.04
  Bottom 0.254: v12.74,87.28 14.98,85.04 v17.14,85.04
SCK2  (via drill 0.38)
  Top 0.254: U7.9 73.22,30.07 72.11,30.07 v71.75,30.43
  Bottom 0.254: v67.35,32.67 69.59,30.43 v71.75,30.43
SCK3  (via drill 0.38)
  Top 0.254: U10.9 73.22,84.68 72.11,84.68 v71.75,85.04
  Bottom 0.254: v67.35,87.28 69.59,85.04 v71.75,85.04
TX_LED  (via drill 0.38)
  Top 0.254: v14.35,27.46 R7.2 | v19.11,19.11 20.01,20.01 20.55,20.01 22.71,22.17 22.71,23.29 U3.22
  Bottom 0.254: v14.35,27.46 14.89,26.93 15.79,26.93 17.14,25.58 17.14,21.09 v19.11,19.11
TX_LED1  (via drill 0.38)
  Top 0.254: v14.35,82.07 R15.2 | v19.11,73.72 20.01,74.62 20.55,74.62 22.71,76.78 22.71,77.9 U4.22
  Bottom 0.254: v14.35,82.07 14.89,81.54 15.79,81.54 17.14,80.19 17.14,75.7 v19.11,73.72
TX_LED2  (via drill 0.38)
  Top 0.254: v68.96,27.46 R23.2 | v73.72,19.11 74.62,20.01 75.16,20.01 77.32,22.17 77.32,23.29 U7.22
  Bottom 0.254: v68.96,27.46 69.5,26.93 70.4,26.93 71.75,25.58 71.75,21.09 v73.72,19.11
TX_LED3  (via drill 0.38)
  Top 0.254: v68.96,82.07 R31.2 | v73.72,73.72 74.62,74.62 75.16,74.62 77.32,76.78 77.32,77.9 U10.22
  Bottom 0.254: v68.96,82.07 69.5,81.54 70.4,81.54 71.75,80.19 71.75,75.7 v73.72,73.72
USER_LED
  Top 0.254: R8.2 28.06,26.21 27.42,26.21 U3.32
USER_LED1
  Top 0.254: R16.2 28.06,80.82 27.42,80.82 U4.32
USER_LED2
  Top 0.254: R24.2 82.67,26.21 82.03,26.21 U7.32
USER_LED3
  Top 0.254: R32.2 82.67,80.82 82.03,80.82 U10.32
V_BATT  (via drill 0.51)
  Top 0.254: U1.3 22.8,40.31 23.06,40.31 v24.95,38.42 | D1.A 27.73,10.49 27.73,11.03 29.26,12.56 29.26,14.74 JP1.2 28,17.79 28,19.02 C8.2 31.69,24.32 31.69,24.86 34.65,27.82 34.65,28 32.58,30.07 32.58,30.79 34.02,32.23 34.02,32.94 28.99,37.97 28.09,37.97 v26.75,36.62
  Bottom 0.254: v24.95,38.42 v26.75,36.62
V_BATT1  (via drill 0.51)
  Top 0.254: U5.3 22.8,94.92 23.06,94.92 v24.95,93.03 | D12.A 27.73,65.1 27.73,65.64 29.26,67.17 29.26,69.35 JP4.2 28,72.4 28,73.63 C16.2 31.69,78.93 31.69,79.47 34.65,82.44 34.65,82.61 32.58,84.68 32.58,85.4 34.02,86.84 34.02,87.55 28.99,92.58 28.09,92.58 v26.75,91.23
  Bottom 0.254: v24.95,93.03 v26.75,91.23
V_BATT2  (via drill 0.51)
  Top 0.254: U8.3 77.41,40.31 77.67,40.31 v79.56,38.42 | D18.A 82.34,10.49 82.34,11.03 83.87,12.56 83.87,14.74 JP7.2 82.61,17.79 82.61,19.02 C24.2 86.3,24.32 86.3,24.86 89.26,27.82 89.26,28 87.19,30.07 87.19,30.79 88.63,32.23 88.63,32.94 83.6,37.97 82.7,37.97 v81.36,36.62
  Bottom 0.254: v79.56,38.42 v81.36,36.62
V_BATT3  (via drill 0.51)
  Top 0.254: U11.3 77.41,94.92 77.67,94.92 v79.56,93.03 | D24.A 82.34,65.1 82.34,65.64 83.87,67.17 83.87,69.35 JP10.2 82.61,72.4 82.61,73.63 C32.2 86.3,78.93 86.3,79.47 89.26,82.44 89.26,82.61 87.19,84.68 87.19,85.4 88.63,86.84 88.63,87.55 83.6,92.58 82.7,92.58 v81.36,91.23
  Bottom 0.254: v79.56,93.03 v81.36,91.23

## Text on the board
Bottom: v11 | v11 | v11 | v11
Dimension: ROUTE OUT | ROUTE OUT | ROUTE OUT | ROUTE OUT
tPlace: 11 | 10 | 11 | 10 | 9 | 9 | CHG | CHG | ON | 3 | ON | 3 | A2 | A2 | RX | RX | TX | TX | A3 | 2 | A3 | 2 | A4 | + | A4 | + | A5 | A5 | - | - | 11 | 10 | 11 | 10 | 9 | 9 | CHG | CHG | A2 | ON | 3 | A2 | ON | 3 | RX | RX | TX | TX | 2 | 2 | A3 | A3 | A4 | + | A4 | + | A5 | - | A5 | -